# EAGLE board Qwiic Mux-Panel (EAGLE 9.6.0), part 1 of 3
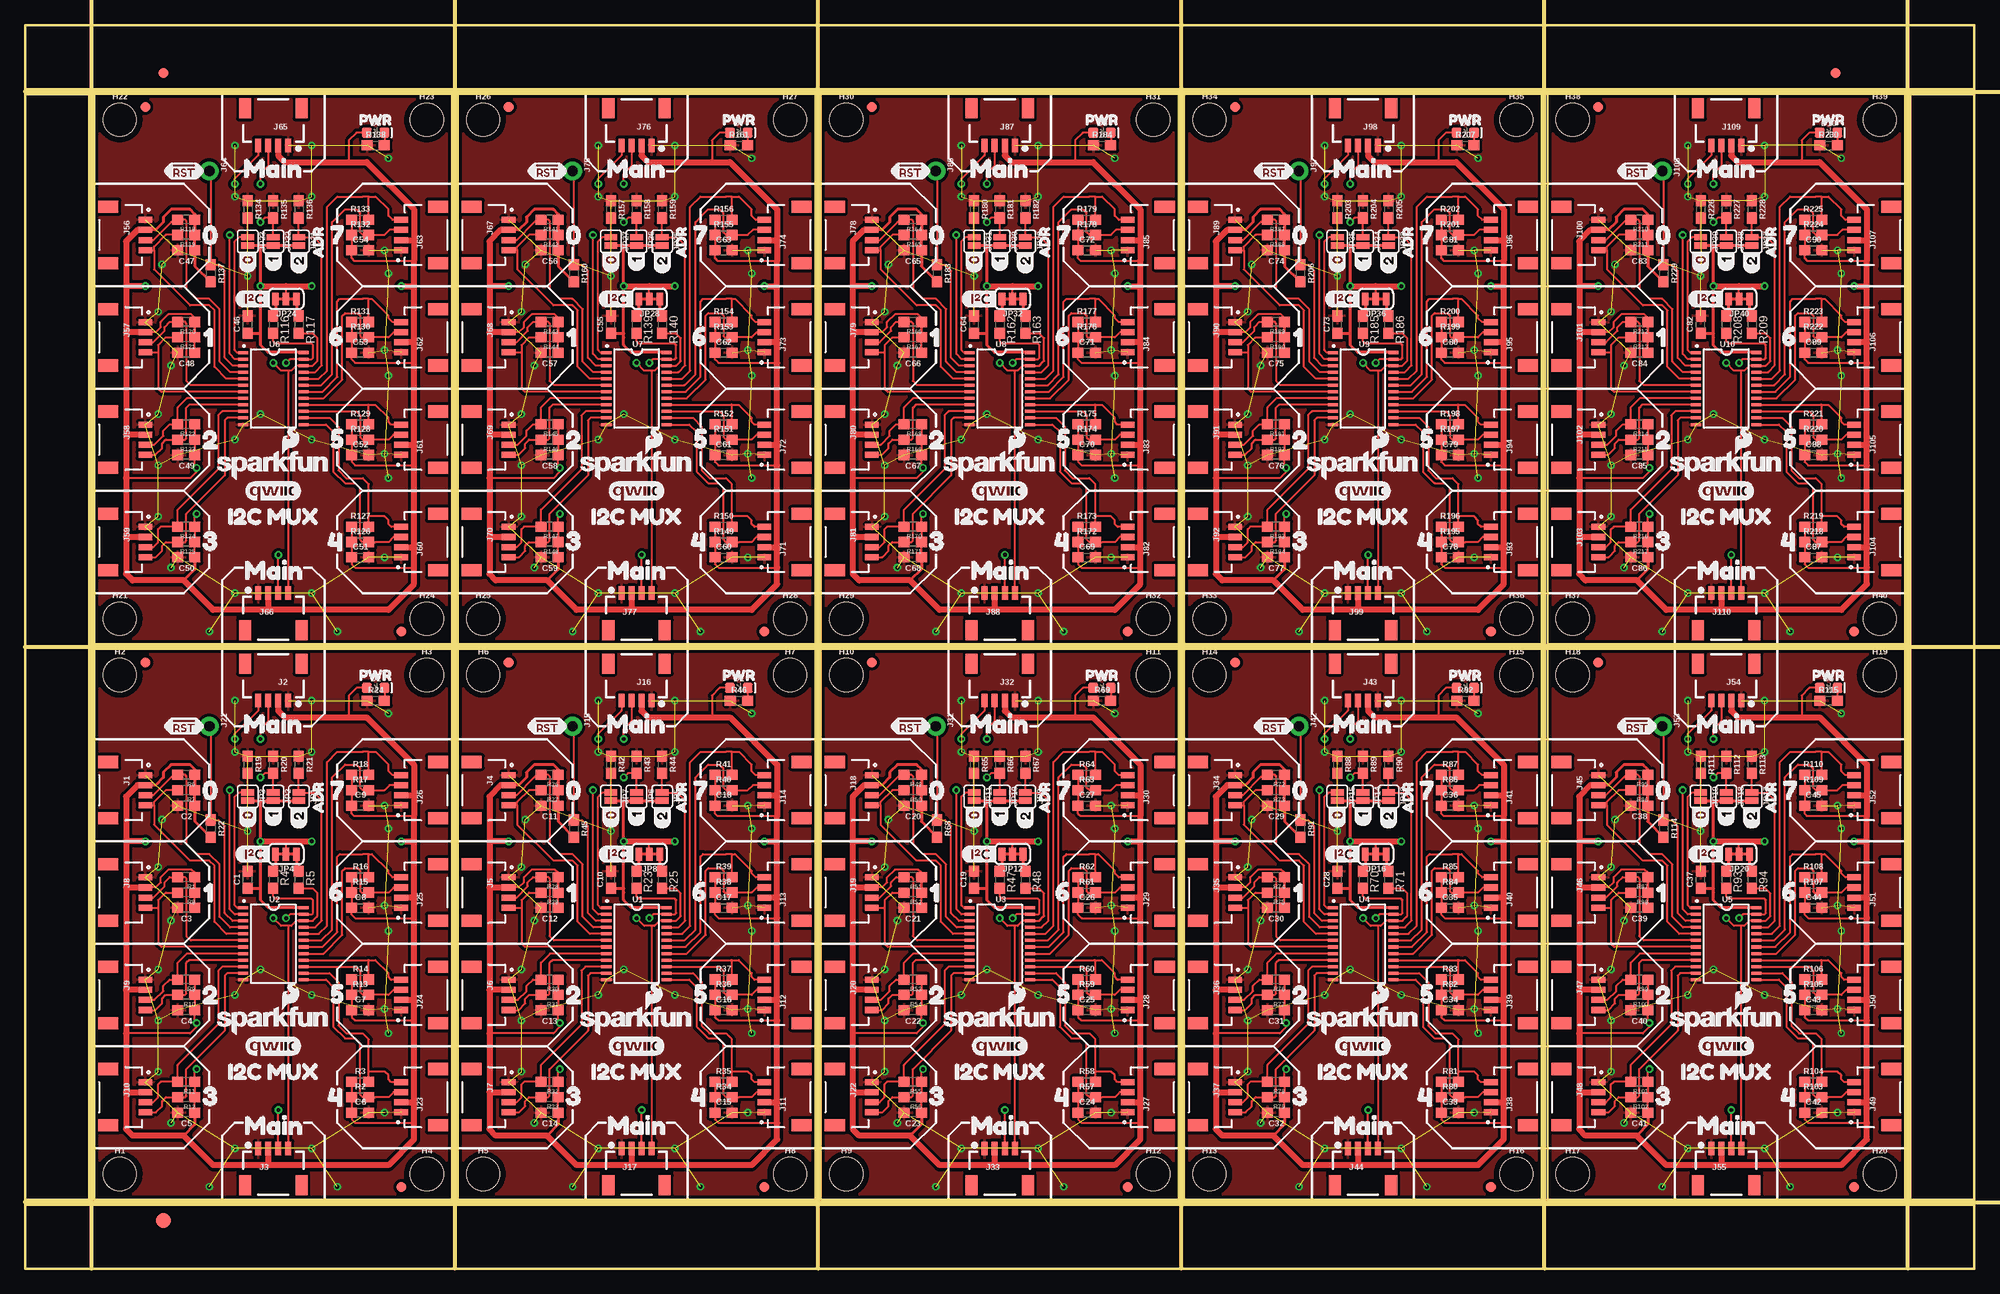
[diagram p0: board, top side]
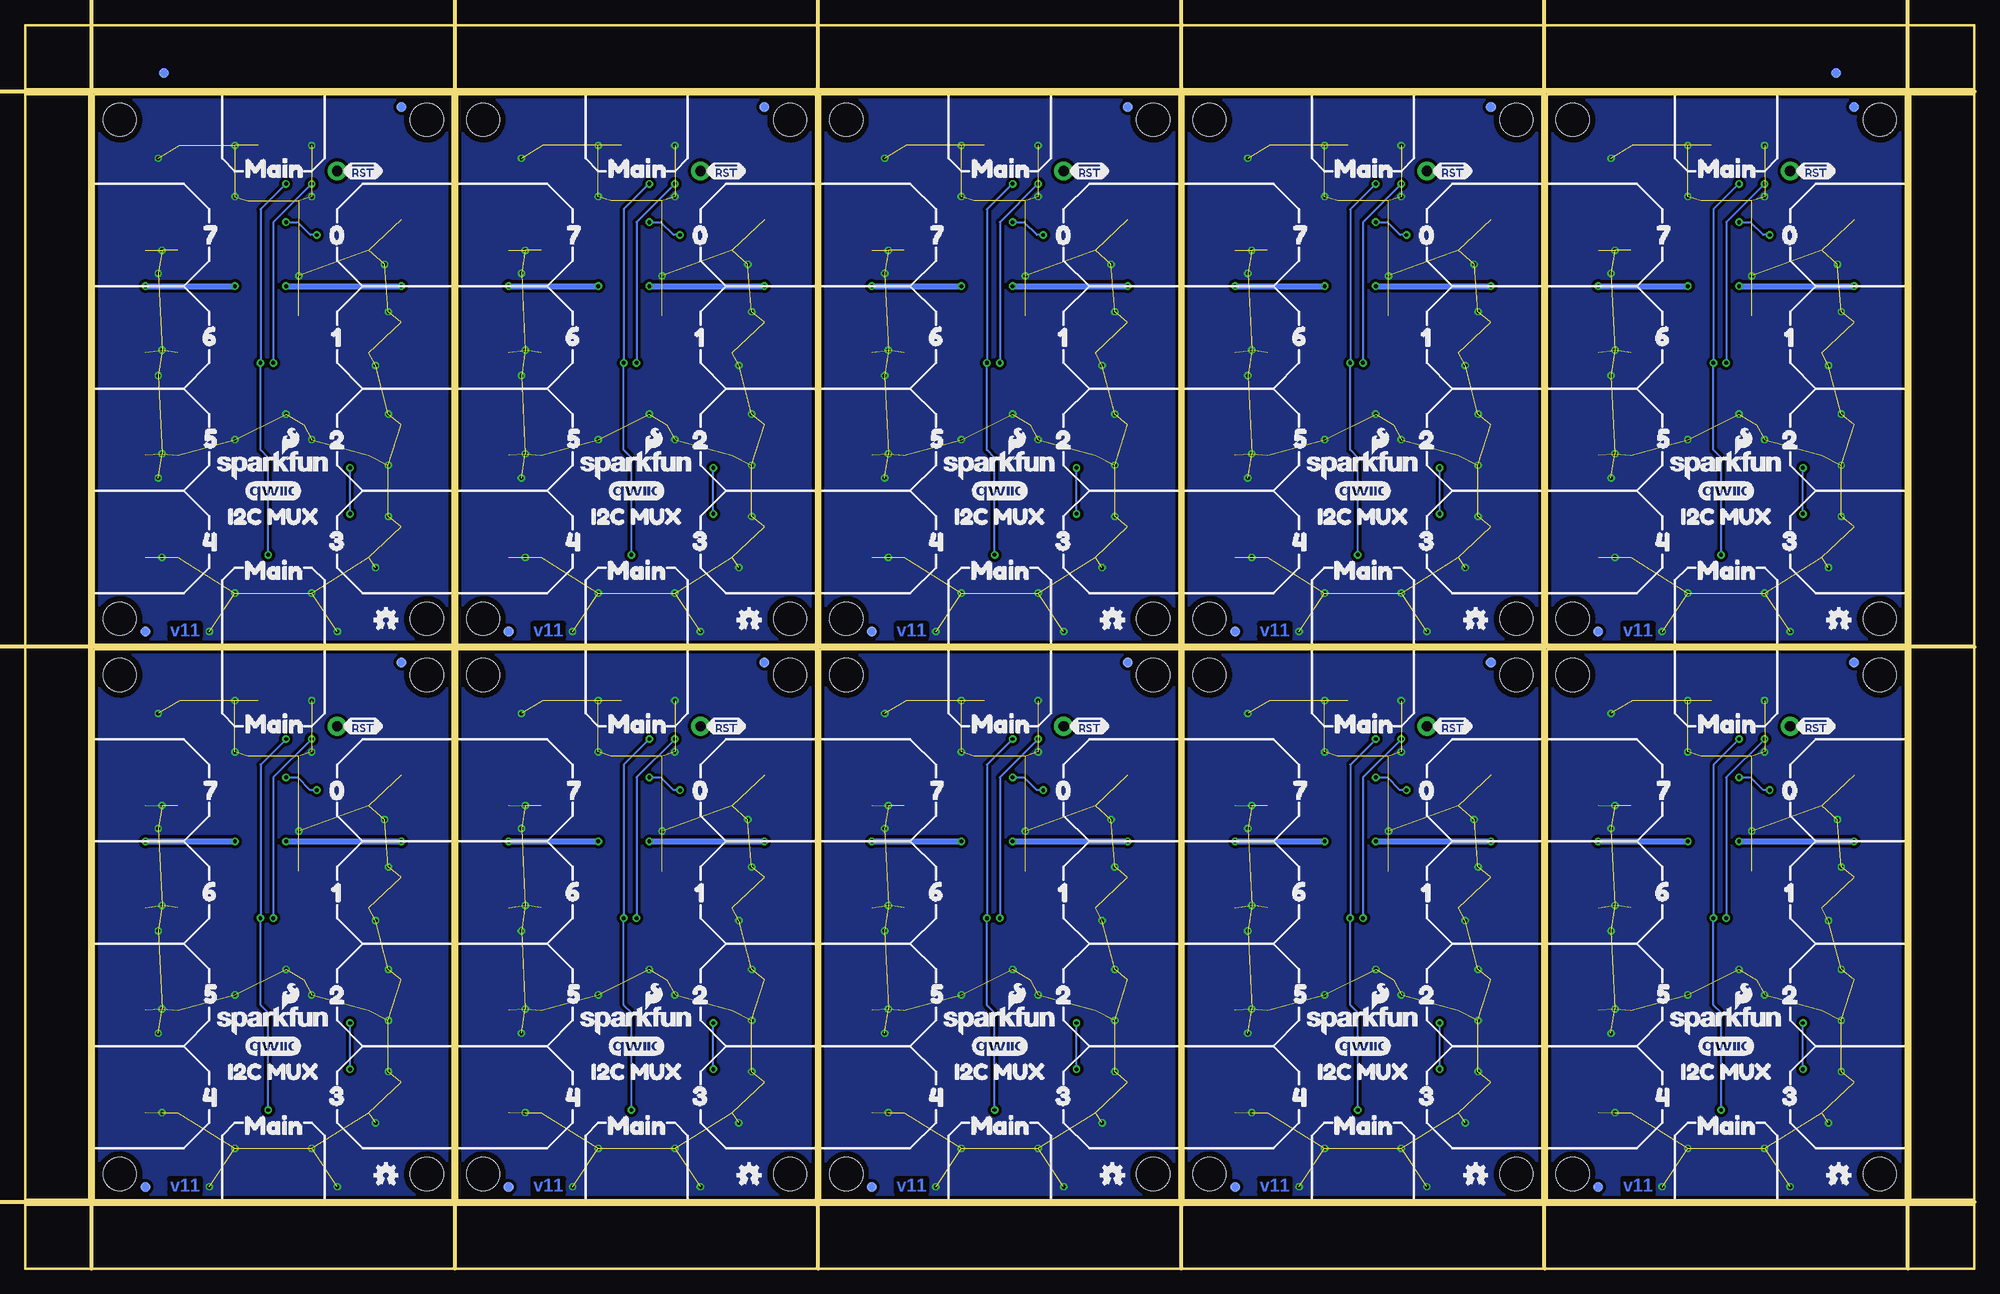
[diagram p1: board, bottom side, seen from below]

Size 193.55 x 123.44 mm. Coordinates in mm from the lower left corner, seen from the top.
Outline: 6.86,61.47 6.86,6.86 42.42,6.86 42.42,61.47 6.86,61.47
Outline: 42.93,61.47 42.93,6.86 78.49,6.86 78.49,61.47 42.93,61.47
Outline: 78.99,61.47 78.99,6.86 114.55,6.86 114.55,61.47 78.99,61.47
Outline: 115.06,61.47 115.06,6.86 150.62,6.86 150.62,61.47 115.06,61.47
Outline: 151.13,61.47 151.13,6.86 186.69,6.86 186.69,61.47 151.13,61.47
Outline: 6.86,116.59 6.86,61.98 42.42,61.98 42.42,116.59 6.86,116.59
Outline: 42.93,116.59 42.93,61.98 78.49,61.98 78.49,116.59 42.93,116.59
Outline: 78.99,116.59 78.99,61.98 114.55,61.98 114.55,116.59 78.99,116.59
Outline: 115.06,116.59 115.06,61.98 150.62,61.98 150.62,116.59 115.06,116.59
Outline: 151.13,116.59 151.13,61.98 186.69,61.98 186.69,116.59 151.13,116.59
Outline: 0,6.35 193.55,6.35 193.55,0 0,0 0,6.35
Outline: 187.2,116.59 193.55,116.59 193.55,6.86 187.2,6.86 187.2,116.59
Outline: 0,123.44 193.55,123.44 193.55,117.09 0,117.09 0,123.44
Outline: 0,116.59 6.35,116.59 6.35,6.86 0,6.86 0,116.59
Copper layers (1*16): Top 0.035mm / dielectric 1.5mm / Bottom 0.035mm
Design rules "SFE-Design": minimum track width 7mil, minimum drill 15mil, track to track 6mil, track to pad 6mil, pad to pad 6mil, via to via 6mil, smd to smd 6mil, copper to edge 7mil, drill to drill 7mil, minimum pad ring 7mil, minimum via ring 7mil, stop-mask expansion 4mil, vias tented up to drill 25mil, thermal gap 10mil
Net classes: 0 Default: width 0.178 mm; 1 vcc: width 0.178 mm
Milling: 9 lines

## Footprints (pad centres in the part's own frame; a part is rotated, then mirrored left to right if it is on the bottom)
0603 = smd 1.1 x 1: 1 -0.85,0; 2 0.85,0
LED-0603 = smd 1 x 1: A -0.877,0; C 0.877,0
FIDUCIAL-1X2 = smd 1 x 1: 1 0,0
FIDUCIAL-1.5X3 = smd 1.5 x 1.5: 1 0,0
STAND-OFF = hole 3.302: 0,0
JST04_1MM_RA = smd 0.6 x 1.35: 1 -1.5,0; 2 -0.5,0; 3 0.5,0; 4 1.5,0 | smd 1.2 x 2: NC1 2.8,-3.675; NC2 -2.8,-3.675
1X04_1MM_RA = smd 0.6 x 1.35: 1 -1.5,0; 2 -0.5,0; 3 0.5,0; 4 1.5,0 | smd 1.2 x 2: NC1 2.8,-3.675; NC2 -2.8,-3.675
1X01_NO_SILK = drill 1.016 pad 1.88: 1 0,0
SMT-JUMPER_2_NO_SILK = smd 0.635 x 1.27: 1 -0.406,0; 2 0.406,0
SMT-JUMPER_3_2-NC_TRACE_SILK = smd 0.66 x 1.27: 1 -1.041,0; 2 0,0; 3 1.041,0
TSSOP28 = smd 1 x 0.3: 1 -3,3.57; 2 -3,2.925; 3 -3,2.275; 4 -3,1.625; 5 -3,0.975; 6 -3,0.325; 7 -3,-0.325; 8 -3,-0.975; 9 -3,-1.625; 10 -3,-2.275; 11 -3,-2.925; 12 -3,-3.575; 13 3,-3.575; 14 3,-2.925; 15 3,-2.275; 16 3,-1.625; 17 3,-0.975; 18 3,-0.325; 19 3,0.325; 20 3,0.975; 21 3,1.625; 22 3,2.275; 23 3,2.925; 24 3,3.575

## Placement (x,y rotation side)
C1  0.1uF  [0603]  22.1,38.61 90 top
C2  1.0uF  [0603]  16,45.97 180 top
C3  1.0uF  [0603]  16,35.81 180 top
C4  1.0uF  [0603]  16,25.65 180 top
C5  1.0uF  [0603]  16,15.49 180 top
C6  1.0uF  [0603]  33.27,15.49 0 top
C7  1.0uF  [0603]  33.27,25.65 0 top
C8  1.0uF  [0603]  33.27,35.81 0 top
C9  1.0uF  [0603]  33.27,45.97 0 top
C10  0.1uF  [0603]  58.17,38.61 90 top
C11  1.0uF  [0603]  52.07,45.97 180 top
C12  1.0uF  [0603]  52.07,35.81 180 top
C13  1.0uF  [0603]  52.07,25.65 180 top
C14  1.0uF  [0603]  52.07,15.49 180 top
C15  1.0uF  [0603]  69.34,15.49 0 top
C16  1.0uF  [0603]  69.34,25.65 0 top
C17  1.0uF  [0603]  69.34,35.81 0 top
C18  1.0uF  [0603]  69.34,45.97 0 top
C19  0.1uF  [0603]  94.23,38.61 90 top
C20  1.0uF  [0603]  88.14,45.97 180 top
C21  1.0uF  [0603]  88.14,35.81 180 top
C22  1.0uF  [0603]  88.14,25.65 180 top
C23  1.0uF  [0603]  88.14,15.49 180 top
C24  1.0uF  [0603]  105.41,15.49 0 top
C25  1.0uF  [0603]  105.41,25.65 0 top
C26  1.0uF  [0603]  105.41,35.81 0 top
C27  1.0uF  [0603]  105.41,45.97 0 top
C28  0.1uF  [0603]  130.3,38.61 90 top
C29  1.0uF  [0603]  124.21,45.97 180 top
C30  1.0uF  [0603]  124.21,35.81 180 top
C31  1.0uF  [0603]  124.21,25.65 180 top
C32  1.0uF  [0603]  124.21,15.49 180 top
C33  1.0uF  [0603]  141.48,15.49 0 top
C34  1.0uF  [0603]  141.48,25.65 0 top
C35  1.0uF  [0603]  141.48,35.81 0 top
C36  1.0uF  [0603]  141.48,45.97 0 top
C37  0.1uF  [0603]  166.37,38.61 90 top
C38  1.0uF  [0603]  160.27,45.97 180 top
C39  1.0uF  [0603]  160.27,35.81 180 top
C40  1.0uF  [0603]  160.27,25.65 180 top
C41  1.0uF  [0603]  160.27,15.49 180 top
C42  1.0uF  [0603]  177.55,15.49 0 top
C43  1.0uF  [0603]  177.55,25.65 0 top
C44  1.0uF  [0603]  177.55,35.81 0 top
C45  1.0uF  [0603]  177.55,45.97 0 top
C46  0.1uF  [0603]  22.1,93.73 90 top
C47  1.0uF  [0603]  16,101.09 180 top
C48  1.0uF  [0603]  16,90.93 180 top
C49  1.0uF  [0603]  16,80.77 180 top
C50  1.0uF  [0603]  16,70.61 180 top
C51  1.0uF  [0603]  33.27,70.61 0 top
C52  1.0uF  [0603]  33.27,80.77 0 top
C53  1.0uF  [0603]  33.27,90.93 0 top
C54  1.0uF  [0603]  33.27,101.09 0 top
C55  0.1uF  [0603]  58.17,93.73 90 top
C56  1.0uF  [0603]  52.07,101.09 180 top
C57  1.0uF  [0603]  52.07,90.93 180 top
C58  1.0uF  [0603]  52.07,80.77 180 top
C59  1.0uF  [0603]  52.07,70.61 180 top
C60  1.0uF  [0603]  69.34,70.61 0 top
C61  1.0uF  [0603]  69.34,80.77 0 top
C62  1.0uF  [0603]  69.34,90.93 0 top
C63  1.0uF  [0603]  69.34,101.09 0 top
C64  0.1uF  [0603]  94.23,93.73 90 top
C65  1.0uF  [0603]  88.14,101.09 180 top
C66  1.0uF  [0603]  88.14,90.93 180 top
C67  1.0uF  [0603]  88.14,80.77 180 top
C68  1.0uF  [0603]  88.14,70.61 180 top
C69  1.0uF  [0603]  105.41,70.61 0 top
C70  1.0uF  [0603]  105.41,80.77 0 top
C71  1.0uF  [0603]  105.41,90.93 0 top
C72  1.0uF  [0603]  105.41,101.09 0 top
C73  0.1uF  [0603]  130.3,93.73 90 top
C74  1.0uF  [0603]  124.21,101.09 180 top
C75  1.0uF  [0603]  124.21,90.93 180 top
C76  1.0uF  [0603]  124.21,80.77 180 top
C77  1.0uF  [0603]  124.21,70.61 180 top
C78  1.0uF  [0603]  141.48,70.61 0 top
C79  1.0uF  [0603]  141.48,80.77 0 top
C80  1.0uF  [0603]  141.48,90.93 0 top
C81  1.0uF  [0603]  141.48,101.09 0 top
C82  0.1uF  [0603]  166.37,93.73 90 top
C83  1.0uF  [0603]  160.27,101.09 180 top
C84  1.0uF  [0603]  160.27,90.93 180 top
C85  1.0uF  [0603]  160.27,80.77 180 top
C86  1.0uF  [0603]  160.27,70.61 180 top
C87  1.0uF  [0603]  177.55,70.61 0 top
C88  1.0uF  [0603]  177.55,80.77 0 top
C89  1.0uF  [0603]  177.55,90.93 0 top
C90  1.0uF  [0603]  177.55,101.09 0 top
D1  RED  [LED-0603]  70.87,57.66 0 top
D2  RED  [LED-0603]  34.8,57.66 0 top
D3  RED  [LED-0603]  106.93,57.66 0 top
D4  RED  [LED-0603]  143,57.66 0 top
D5  RED  [LED-0603]  179.07,57.66 0 top
D6  RED  [LED-0603]  34.8,112.78 0 top
D7  RED  [LED-0603]  70.87,112.78 0 top
D8  RED  [LED-0603]  106.93,112.78 0 top
D9  RED  [LED-0603]  143,112.78 0 top
D10  RED  [LED-0603]  179.07,112.78 0 top
E$1  [FIDUCIAL-1X2]  13.72,118.68 0 top
E$2  [FIDUCIAL-1X2]  13.72,118.68 0 bottom
E$3  [FIDUCIAL-1X2]  179.77,118.68 0 top
E$4  [FIDUCIAL-1X2]  179.77,118.68 0 bottom
E$5  [FIDUCIAL-1.5X3]  13.72,4.76 0 top
FD1  FIDUCIAL1X2  [FIDUCIAL-1X2]  11.94,60.2 180 top
FD2  FIDUCIAL1X2  [FIDUCIAL-1X2]  37.34,8.13 180 top
FD3  FIDUCIAL1X2  [FIDUCIAL-1X2]  37.34,8.13 0 bottom
FD4  FIDUCIAL1X2  [FIDUCIAL-1X2]  11.94,60.2 0 bottom
FD5  FIDUCIAL1X2  [FIDUCIAL-1X2]  48.01,60.2 180 top
FD6  FIDUCIAL1X2  [FIDUCIAL-1X2]  73.41,8.13 180 top
FD7  FIDUCIAL1X2  [FIDUCIAL-1X2]  73.41,8.13 0 bottom
FD8  FIDUCIAL1X2  [FIDUCIAL-1X2]  48.01,60.2 0 bottom
FD9  FIDUCIAL1X2  [FIDUCIAL-1X2]  84.07,60.2 180 top
FD10  FIDUCIAL1X2  [FIDUCIAL-1X2]  109.47,8.13 180 top
FD11  FIDUCIAL1X2  [FIDUCIAL-1X2]  109.47,8.13 0 bottom
FD12  FIDUCIAL1X2  [FIDUCIAL-1X2]  84.07,60.2 0 bottom
FD13  FIDUCIAL1X2  [FIDUCIAL-1X2]  120.14,60.2 180 top
FD14  FIDUCIAL1X2  [FIDUCIAL-1X2]  145.54,8.13 180 top
FD15  FIDUCIAL1X2  [FIDUCIAL-1X2]  145.54,8.13 0 bottom
FD16  FIDUCIAL1X2  [FIDUCIAL-1X2]  120.14,60.2 0 bottom
FD17  FIDUCIAL1X2  [FIDUCIAL-1X2]  156.21,60.2 180 top
FD18  FIDUCIAL1X2  [FIDUCIAL-1X2]  181.61,8.13 180 top
FD19  FIDUCIAL1X2  [FIDUCIAL-1X2]  181.61,8.13 0 bottom
FD20  FIDUCIAL1X2  [FIDUCIAL-1X2]  156.21,60.2 0 bottom
FD21  FIDUCIAL1X2  [FIDUCIAL-1X2]  11.94,115.32 180 top
FD22  FIDUCIAL1X2  [FIDUCIAL-1X2]  37.34,63.25 180 top
FD23  FIDUCIAL1X2  [FIDUCIAL-1X2]  37.34,63.25 0 bottom
FD24  FIDUCIAL1X2  [FIDUCIAL-1X2]  11.94,115.32 0 bottom
FD25  FIDUCIAL1X2  [FIDUCIAL-1X2]  48.01,115.32 180 top
FD26  FIDUCIAL1X2  [FIDUCIAL-1X2]  73.41,63.25 180 top
FD27  FIDUCIAL1X2  [FIDUCIAL-1X2]  73.41,63.25 0 bottom
FD28  FIDUCIAL1X2  [FIDUCIAL-1X2]  48.01,115.32 0 bottom
FD29  FIDUCIAL1X2  [FIDUCIAL-1X2]  84.07,115.32 180 top
FD30  FIDUCIAL1X2  [FIDUCIAL-1X2]  109.47,63.25 180 top
FD31  FIDUCIAL1X2  [FIDUCIAL-1X2]  109.47,63.25 0 bottom
FD32  FIDUCIAL1X2  [FIDUCIAL-1X2]  84.07,115.32 0 bottom
FD33  FIDUCIAL1X2  [FIDUCIAL-1X2]  120.14,115.32 180 top
FD34  FIDUCIAL1X2  [FIDUCIAL-1X2]  145.54,63.25 180 top
FD35  FIDUCIAL1X2  [FIDUCIAL-1X2]  145.54,63.25 0 bottom
FD36  FIDUCIAL1X2  [FIDUCIAL-1X2]  120.14,115.32 0 bottom
FD37  FIDUCIAL1X2  [FIDUCIAL-1X2]  156.21,115.32 180 top
FD38  FIDUCIAL1X2  [FIDUCIAL-1X2]  181.61,63.25 180 top
FD39  FIDUCIAL1X2  [FIDUCIAL-1X2]  181.61,63.25 0 bottom
FD40  FIDUCIAL1X2  [FIDUCIAL-1X2]  156.21,115.32 0 bottom
H1  STAND-OFF  [STAND-OFF]  9.4,9.4 0 top
H2  STAND-OFF  [STAND-OFF]  9.4,58.93 0 top
H3  STAND-OFF  [STAND-OFF]  39.88,58.93 0 top
H4  STAND-OFF  [STAND-OFF]  39.88,9.4 0 top
H5  STAND-OFF  [STAND-OFF]  45.47,9.4 0 top
H6  STAND-OFF  [STAND-OFF]  45.47,58.93 0 top
H7  STAND-OFF  [STAND-OFF]  75.95,58.93 0 top
H8  STAND-OFF  [STAND-OFF]  75.95,9.4 0 top
H9  STAND-OFF  [STAND-OFF]  81.53,9.4 0 top
H10  STAND-OFF  [STAND-OFF]  81.53,58.93 0 top
H11  STAND-OFF  [STAND-OFF]  112.01,58.93 0 top
H12  STAND-OFF  [STAND-OFF]  112.01,9.4 0 top
H13  STAND-OFF  [STAND-OFF]  117.6,9.4 0 top
H14  STAND-OFF  [STAND-OFF]  117.6,58.93 0 top
H15  STAND-OFF  [STAND-OFF]  148.08,58.93 0 top
H16  STAND-OFF  [STAND-OFF]  148.08,9.4 0 top
H17  STAND-OFF  [STAND-OFF]  153.67,9.4 0 top
H18  STAND-OFF  [STAND-OFF]  153.67,58.93 0 top
H19  STAND-OFF  [STAND-OFF]  184.15,58.93 0 top
H20  STAND-OFF  [STAND-OFF]  184.15,9.4 0 top
H21  STAND-OFF  [STAND-OFF]  9.4,64.52 0 top
H22  STAND-OFF  [STAND-OFF]  9.4,114.05 0 top
H23  STAND-OFF  [STAND-OFF]  39.88,114.05 0 top
H24  STAND-OFF  [STAND-OFF]  39.88,64.52 0 top
H25  STAND-OFF  [STAND-OFF]  45.47,64.52 0 top
H26  STAND-OFF  [STAND-OFF]  45.47,114.05 0 top
H27  STAND-OFF  [STAND-OFF]  75.95,114.05 0 top
H28  STAND-OFF  [STAND-OFF]  75.95,64.52 0 top
H29  STAND-OFF  [STAND-OFF]  81.53,64.52 0 top
H30  STAND-OFF  [STAND-OFF]  81.53,114.05 0 top
H31  STAND-OFF  [STAND-OFF]  112.01,114.05 0 top
H32  STAND-OFF  [STAND-OFF]  112.01,64.52 0 top
H33  STAND-OFF  [STAND-OFF]  117.6,64.52 0 top
H34  STAND-OFF  [STAND-OFF]  117.6,114.05 0 top
H35  STAND-OFF  [STAND-OFF]  148.08,114.05 0 top
H36  STAND-OFF  [STAND-OFF]  148.08,64.52 0 top
H37  STAND-OFF  [STAND-OFF]  153.67,64.52 0 top
H38  STAND-OFF  [STAND-OFF]  153.67,114.05 0 top
H39  STAND-OFF  [STAND-OFF]  184.15,114.05 0 top
H40  STAND-OFF  [STAND-OFF]  184.15,64.52 0 top
J1  QWIIC_RIGHT_ANGLE  [JST04_1MM_RA]  11.94,47.5 270 top
J2  SMD  [1X04_1MM_RA]  24.64,56.39 180 top
J3  SMD  [1X04_1MM_RA]  24.64,11.94 0 top
J4  QWIIC_RIGHT_ANGLE  [JST04_1MM_RA]  48.01,47.5 270 top
J5  QWIIC_RIGHT_ANGLE  [JST04_1MM_RA]  48.01,37.34 270 top
J6  QWIIC_RIGHT_ANGLE  [JST04_1MM_RA]  48.01,27.18 270 top
J7  QWIIC_RIGHT_ANGLE  [JST04_1MM_RA]  48.01,17.02 270 top
J8  QWIIC_RIGHT_ANGLE  [JST04_1MM_RA]  11.94,37.34 270 top
J9  QWIIC_RIGHT_ANGLE  [JST04_1MM_RA]  11.94,27.18 270 top
J10  QWIIC_RIGHT_ANGLE  [JST04_1MM_RA]  11.94,17.02 270 top
J11  QWIIC_RIGHT_ANGLE  [JST04_1MM_RA]  73.41,17.02 90 top
J12  QWIIC_RIGHT_ANGLE  [JST04_1MM_RA]  73.41,27.18 90 top
J13  QWIIC_RIGHT_ANGLE  [JST04_1MM_RA]  73.41,37.34 90 top
J14  QWIIC_RIGHT_ANGLE  [JST04_1MM_RA]  73.41,47.5 90 top
J15  [1X01_NO_SILK]  54.36,53.85 270 top
J16  SMD  [1X04_1MM_RA]  60.71,56.39 180 top
J17  SMD  [1X04_1MM_RA]  60.71,11.94 0 top
J18  QWIIC_RIGHT_ANGLE  [JST04_1MM_RA]  84.07,47.5 270 top
J19  QWIIC_RIGHT_ANGLE  [JST04_1MM_RA]  84.07,37.34 270 top
J20  QWIIC_RIGHT_ANGLE  [JST04_1MM_RA]  84.07,27.18 270 top
J21  [1X01_NO_SILK]  18.29,53.85 270 top
J22  QWIIC_RIGHT_ANGLE  [JST04_1MM_RA]  84.07,17.02 270 top
J23  QWIIC_RIGHT_ANGLE  [JST04_1MM_RA]  37.34,17.02 90 top
J24  QWIIC_RIGHT_ANGLE  [JST04_1MM_RA]  37.34,27.18 90 top
J25  QWIIC_RIGHT_ANGLE  [JST04_1MM_RA]  37.34,37.34 90 top
J26  QWIIC_RIGHT_ANGLE  [JST04_1MM_RA]  37.34,47.5 90 top
J27  QWIIC_RIGHT_ANGLE  [JST04_1MM_RA]  109.47,17.02 90 top
J28  QWIIC_RIGHT_ANGLE  [JST04_1MM_RA]  109.47,27.18 90 top
J29  QWIIC_RIGHT_ANGLE  [JST04_1MM_RA]  109.47,37.34 90 top
J30  QWIIC_RIGHT_ANGLE  [JST04_1MM_RA]  109.47,47.5 90 top
J31  [1X01_NO_SILK]  90.42,53.85 270 top
J32  SMD  [1X04_1MM_RA]  96.77,56.39 180 top
J33  SMD  [1X04_1MM_RA]  96.77,11.94 0 top
J34  QWIIC_RIGHT_ANGLE  [JST04_1MM_RA]  120.14,47.5 270 top
J35  QWIIC_RIGHT_ANGLE  [JST04_1MM_RA]  120.14,37.34 270 top
J36  QWIIC_RIGHT_ANGLE  [JST04_1MM_RA]  120.14,27.18 270 top
J37  QWIIC_RIGHT_ANGLE  [JST04_1MM_RA]  120.14,17.02 270 top
J38  QWIIC_RIGHT_ANGLE  [JST04_1MM_RA]  145.54,17.02 90 top
J39  QWIIC_RIGHT_ANGLE  [JST04_1MM_RA]  145.54,27.18 90 top
J40  QWIIC_RIGHT_ANGLE  [JST04_1MM_RA]  145.54,37.34 90 top
J41  QWIIC_RIGHT_ANGLE  [JST04_1MM_RA]  145.54,47.5 90 top
J42  [1X01_NO_SILK]  126.49,53.85 270 top
J43  SMD  [1X04_1MM_RA]  132.84,56.39 180 top
J44  SMD  [1X04_1MM_RA]  132.84,11.94 0 top
J45  QWIIC_RIGHT_ANGLE  [JST04_1MM_RA]  156.21,47.5 270 top
J46  QWIIC_RIGHT_ANGLE  [JST04_1MM_RA]  156.21,37.34 270 top
J47  QWIIC_RIGHT_ANGLE  [JST04_1MM_RA]  156.21,27.18 270 top
J48  QWIIC_RIGHT_ANGLE  [JST04_1MM_RA]  156.21,17.02 270 top
J49  QWIIC_RIGHT_ANGLE  [JST04_1MM_RA]  181.61,17.02 90 top
J50  QWIIC_RIGHT_ANGLE  [JST04_1MM_RA]  181.61,27.18 90 top
J51  QWIIC_RIGHT_ANGLE  [JST04_1MM_RA]  181.61,37.34 90 top
J52  QWIIC_RIGHT_ANGLE  [JST04_1MM_RA]  181.61,47.5 90 top
J53  [1X01_NO_SILK]  162.56,53.85 270 top
J54  SMD  [1X04_1MM_RA]  168.91,56.39 180 top
J55  SMD  [1X04_1MM_RA]  168.91,11.94 0 top
J56  QWIIC_RIGHT_ANGLE  [JST04_1MM_RA]  11.94,102.62 270 top
J57  QWIIC_RIGHT_ANGLE  [JST04_1MM_RA]  11.94,92.46 270 top
J58  QWIIC_RIGHT_ANGLE  [JST04_1MM_RA]  11.94,82.3 270 top
J59  QWIIC_RIGHT_ANGLE  [JST04_1MM_RA]  11.94,72.14 270 top
J60  QWIIC_RIGHT_ANGLE  [JST04_1MM_RA]  37.34,72.14 90 top
J61  QWIIC_RIGHT_ANGLE  [JST04_1MM_RA]  37.34,82.3 90 top
J62  QWIIC_RIGHT_ANGLE  [JST04_1MM_RA]  37.34,92.46 90 top
J63  QWIIC_RIGHT_ANGLE  [JST04_1MM_RA]  37.34,102.62 90 top
J64  [1X01_NO_SILK]  18.29,108.97 270 top
J65  SMD  [1X04_1MM_RA]  24.64,111.51 180 top
J66  SMD  [1X04_1MM_RA]  24.64,67.06 0 top
J67  QWIIC_RIGHT_ANGLE  [JST04_1MM_RA]  48.01,102.62 270 top
J68  QWIIC_RIGHT_ANGLE  [JST04_1MM_RA]  48.01,92.46 270 top
J69  QWIIC_RIGHT_ANGLE  [JST04_1MM_RA]  48.01,82.3 270 top
J70  QWIIC_RIGHT_ANGLE  [JST04_1MM_RA]  48.01,72.14 270 top
J71  QWIIC_RIGHT_ANGLE  [JST04_1MM_RA]  73.41,72.14 90 top
J72  QWIIC_RIGHT_ANGLE  [JST04_1MM_RA]  73.41,82.3 90 top
J73  QWIIC_RIGHT_ANGLE  [JST04_1MM_RA]  73.41,92.46 90 top
J74  QWIIC_RIGHT_ANGLE  [JST04_1MM_RA]  73.41,102.62 90 top
J75  [1X01_NO_SILK]  54.36,108.97 270 top
J76  SMD  [1X04_1MM_RA]  60.71,111.51 180 top
J77  SMD  [1X04_1MM_RA]  60.71,67.06 0 top
J78  QWIIC_RIGHT_ANGLE  [JST04_1MM_RA]  84.07,102.62 270 top
J79  QWIIC_RIGHT_ANGLE  [JST04_1MM_RA]  84.07,92.46 270 top
J80  QWIIC_RIGHT_ANGLE  [JST04_1MM_RA]  84.07,82.3 270 top
J81  QWIIC_RIGHT_ANGLE  [JST04_1MM_RA]  84.07,72.14 270 top
J82  QWIIC_RIGHT_ANGLE  [JST04_1MM_RA]  109.47,72.14 90 top
J83  QWIIC_RIGHT_ANGLE  [JST04_1MM_RA]  109.47,82.3 90 top
J84  QWIIC_RIGHT_ANGLE  [JST04_1MM_RA]  109.47,92.46 90 top
J85  QWIIC_RIGHT_ANGLE  [JST04_1MM_RA]  109.47,102.62 90 top
J86  [1X01_NO_SILK]  90.42,108.97 270 top
J87  SMD  [1X04_1MM_RA]  96.77,111.51 180 top
J88  SMD  [1X04_1MM_RA]  96.77,67.06 0 top
J89  QWIIC_RIGHT_ANGLE  [JST04_1MM_RA]  120.14,102.62 270 top
J90  QWIIC_RIGHT_ANGLE  [JST04_1MM_RA]  120.14,92.46 270 top
J91  QWIIC_RIGHT_ANGLE  [JST04_1MM_RA]  120.14,82.3 270 top
J92  QWIIC_RIGHT_ANGLE  [JST04_1MM_RA]  120.14,72.14 270 top
J93  QWIIC_RIGHT_ANGLE  [JST04_1MM_RA]  145.54,72.14 90 top
J94  QWIIC_RIGHT_ANGLE  [JST04_1MM_RA]  145.54,82.3 90 top
J95  QWIIC_RIGHT_ANGLE  [JST04_1MM_RA]  145.54,92.46 90 top
J96  QWIIC_RIGHT_ANGLE  [JST04_1MM_RA]  145.54,102.62 90 top
J97  [1X01_NO_SILK]  126.49,108.97 270 top
J98  SMD  [1X04_1MM_RA]  132.84,111.51 180 top
J99  SMD  [1X04_1MM_RA]  132.84,67.06 0 top
J100  QWIIC_RIGHT_ANGLE  [JST04_1MM_RA]  156.21,102.62 270 top
J101  QWIIC_RIGHT_ANGLE  [JST04_1MM_RA]  156.21,92.46 270 top
J102  QWIIC_RIGHT_ANGLE  [JST04_1MM_RA]  156.21,82.3 270 top
J103  QWIIC_RIGHT_ANGLE  [JST04_1MM_RA]  156.21,72.14 270 top
J104  QWIIC_RIGHT_ANGLE  [JST04_1MM_RA]  181.61,72.14 90 top
J105  QWIIC_RIGHT_ANGLE  [JST04_1MM_RA]  181.61,82.3 90 top
J106  QWIIC_RIGHT_ANGLE  [JST04_1MM_RA]  181.61,92.46 90 top
J107  QWIIC_RIGHT_ANGLE  [JST04_1MM_RA]  181.61,102.62 90 top
J108  [1X01_NO_SILK]  162.56,108.97 270 top
J109  SMD  [1X04_1MM_RA]  168.91,111.51 180 top
J110  SMD  [1X04_1MM_RA]  168.91,67.06 0 top
JP1  JUMPER-SMT_2_NO_SILK  [SMT-JUMPER_2_NO_SILK]  27.18,46.86 270 top
JP2  JUMPER-SMT_2_NO_SILK  [SMT-JUMPER_2_NO_SILK]  24.64,46.86 270 top
JP3  JUMPER-SMT_2_NO_SILK  [SMT-JUMPER_2_NO_SILK]  22.1,46.86 270 top
JP4  JUMPER-SMT_3_2-NC_TRACE_SILK  [SMT-JUMPER_3_2-NC_TRACE_SILK]  25.91,41.15 180 top
JP5  JUMPER-SMT_2_NO_SILK  [SMT-JUMPER_2_NO_SILK]  63.25,46.86 270 top
JP6  JUMPER-SMT_2_NO_SILK  [SMT-JUMPER_2_NO_SILK]  60.71,46.86 270 top
JP7  JUMPER-SMT_2_NO_SILK  [SMT-JUMPER_2_NO_SILK]  58.17,46.86 270 top
JP8  JUMPER-SMT_3_2-NC_TRACE_SILK  [SMT-JUMPER_3_2-NC_TRACE_SILK]  61.98,41.15 180 top
JP9  JUMPER-SMT_2_NO_SILK  [SMT-JUMPER_2_NO_SILK]  99.31,46.86 270 top
JP10  JUMPER-SMT_2_NO_SILK  [SMT-JUMPER_2_NO_SILK]  96.77,46.86 270 top
JP11  JUMPER-SMT_2_NO_SILK  [SMT-JUMPER_2_NO_SILK]  94.23,46.86 270 top
JP12  JUMPER-SMT_3_2-NC_TRACE_SILK  [SMT-JUMPER_3_2-NC_TRACE_SILK]  98.04,41.15 180 top
JP13  JUMPER-SMT_2_NO_SILK  [SMT-JUMPER_2_NO_SILK]  135.38,46.86 270 top
JP14  JUMPER-SMT_2_NO_SILK  [SMT-JUMPER_2_NO_SILK]  132.84,46.86 270 top
JP15  JUMPER-SMT_2_NO_SILK  [SMT-JUMPER_2_NO_SILK]  130.3,46.86 270 top
JP16  JUMPER-SMT_3_2-NC_TRACE_SILK  [SMT-JUMPER_3_2-NC_TRACE_SILK]  134.11,41.15 180 top
JP17  JUMPER-SMT_2_NO_SILK  [SMT-JUMPER_2_NO_SILK]  171.45,46.86 270 top
JP18  JUMPER-SMT_2_NO_SILK  [SMT-JUMPER_2_NO_SILK]  168.91,46.86 270 top
JP19  JUMPER-SMT_2_NO_SILK  [SMT-JUMPER_2_NO_SILK]  166.37,46.86 270 top
JP20  JUMPER-SMT_3_2-NC_TRACE_SILK  [SMT-JUMPER_3_2-NC_TRACE_SILK]  170.18,41.15 180 top
JP21  JUMPER-SMT_2_NO_SILK  [SMT-JUMPER_2_NO_SILK]  27.18,101.98 270 top
JP22  JUMPER-SMT_2_NO_SILK  [SMT-JUMPER_2_NO_SILK]  24.64,101.98 270 top
JP23  JUMPER-SMT_2_NO_SILK  [SMT-JUMPER_2_NO_SILK]  22.1,101.98 270 top
JP24  JUMPER-SMT_3_2-NC_TRACE_SILK  [SMT-JUMPER_3_2-NC_TRACE_SILK]  25.91,96.27 180 top
JP25  JUMPER-SMT_2_NO_SILK  [SMT-JUMPER_2_NO_SILK]  63.25,101.98 270 top
JP26  JUMPER-SMT_2_NO_SILK  [SMT-JUMPER_2_NO_SILK]  60.71,101.98 270 top
JP27  JUMPER-SMT_2_NO_SILK  [SMT-JUMPER_2_NO_SILK]  58.17,101.98 270 top
JP28  JUMPER-SMT_3_2-NC_TRACE_SILK  [SMT-JUMPER_3_2-NC_TRACE_SILK]  61.98,96.27 180 top
JP29  JUMPER-SMT_2_NO_SILK  [SMT-JUMPER_2_NO_SILK]  99.31,101.98 270 top
JP30  JUMPER-SMT_2_NO_SILK  [SMT-JUMPER_2_NO_SILK]  96.77,101.98 270 top
JP31  JUMPER-SMT_2_NO_SILK  [SMT-JUMPER_2_NO_SILK]  94.23,101.98 270 top
JP32  JUMPER-SMT_3_2-NC_TRACE_SILK  [SMT-JUMPER_3_2-NC_TRACE_SILK]  98.04,96.27 180 top
JP33  JUMPER-SMT_2_NO_SILK  [SMT-JUMPER_2_NO_SILK]  135.38,101.98 270 top
JP34  JUMPER-SMT_2_NO_SILK  [SMT-JUMPER_2_NO_SILK]  132.84,101.98 270 top
JP35  JUMPER-SMT_2_NO_SILK  [SMT-JUMPER_2_NO_SILK]  130.3,101.98 270 top
JP36  JUMPER-SMT_3_2-NC_TRACE_SILK  [SMT-JUMPER_3_2-NC_TRACE_SILK]  134.11,96.27 180 top
JP37  JUMPER-SMT_2_NO_SILK  [SMT-JUMPER_2_NO_SILK]  171.45,101.98 270 top
JP38  JUMPER-SMT_2_NO_SILK  [SMT-JUMPER_2_NO_SILK]  168.91,101.98 270 top
JP39  JUMPER-SMT_2_NO_SILK  [SMT-JUMPER_2_NO_SILK]  166.37,101.98 270 top
JP40  JUMPER-SMT_3_2-NC_TRACE_SILK  [SMT-JUMPER_3_2-NC_TRACE_SILK]  170.18,96.27 180 top
LOGO1  OSHW-LOGOMINI  [OSHW-LOGO-MINI]  13.46,9.29 0 bottom
LOGO2  REVISION  [REVISION]  9.4,-4.57 0 top  (outside the outline)
LOGO3  OSHW-LOGOMINI  [OSHW-LOGO-MINI]  49.53,9.29 0 bottom
LOGO4  REVISION  [REVISION]  45.47,-4.57 0 top  (outside the outline)
LOGO5  OSHW-LOGOMINI  [OSHW-LOGO-MINI]  85.59,9.29 0 bottom
LOGO6  REVISION  [REVISION]  81.53,-4.57 0 top  (outside the outline)
LOGO7  OSHW-LOGOMINI  [OSHW-LOGO-MINI]  121.66,9.29 0 bottom
LOGO8  REVISION  [REVISION]  117.6,-4.57 0 top  (outside the outline)
LOGO9  OSHW-LOGOMINI  [OSHW-LOGO-MINI]  157.73,9.29 0 bottom
LOGO10  REVISION  [REVISION]  153.67,-4.57 0 top  (outside the outline)
LOGO11  OSHW-LOGOMINI  [OSHW-LOGO-MINI]  13.46,64.41 0 bottom
LOGO12  REVISION  [REVISION]  9.4,50.55 0 top
LOGO13  OSHW-LOGOMINI  [OSHW-LOGO-MINI]  49.53,64.41 0 bottom
LOGO14  REVISION  [REVISION]  45.47,50.55 0 top
LOGO15  OSHW-LOGOMINI  [OSHW-LOGO-MINI]  85.59,64.41 0 bottom
LOGO16  REVISION  [REVISION]  81.53,50.55 0 top
LOGO17  OSHW-LOGOMINI  [OSHW-LOGO-MINI]  121.66,64.41 0 bottom
LOGO18  REVISION  [REVISION]  117.6,50.55 0 top
LOGO19  OSHW-LOGOMINI  [OSHW-LOGO-MINI]  157.73,64.41 0 bottom
LOGO20  REVISION  [REVISION]  153.67,50.55 0 top
R1  4.7k  [0603]  16,38.86 180 top
R2  4.7k  [0603]  33.27,17.02 0 top
R3  4.7k  [0603]  33.27,18.54 0 top
R4  4.7k  [0603]  24.64,38.61 270 top
R5  4.7k  [0603]  27.18,38.61 270 top
R6  4.7k  [0603]  16,49.02 180 top
R7  4.7k  [0603]  16,47.5 180 top
R8  4.7k  [0603]  16,37.34 180 top
R9  4.7k  [0603]  16,28.7 180 top
R10  4.7k  [0603]  16,27.18 180 top
R11  4.7k  [0603]  16,18.54 180 top
R12  4.7k  [0603]  16,17.02 180 top
R13  4.7k  [0603]  33.27,27.18 0 top
R14  4.7k  [0603]  33.27,28.7 0 top
R15  4.7k  [0603]  33.27,37.34 0 top
R16  4.7k  [0603]  33.27,38.86 0 top
R17  4.7k  [0603]  33.27,47.5 0 top
R18  4.7k  [0603]  33.27,49.02 0 top
R19  10k  [0603]  22.1,50.04 270 top
R20  10k  [0603]  24.64,50.04 270 top
R21  10k  [0603]  27.18,50.04 270 top
R22  10k  [0603]  18.42,43.69 270 top
R23  4.7k  [0603]  60.71,38.61 270 top
R24  1k  [0603]  34.8,56.39 0 top
R25  4.7k  [0603]  63.25,38.61 270 top
R26  4.7k  [0603]  52.07,49.02 180 top
R27  4.7k  [0603]  52.07,47.5 180 top
R28  4.7k  [0603]  52.07,38.86 180 top
R29  4.7k  [0603]  52.07,37.34 180 top
R30  4.7k  [0603]  52.07,28.7 180 top
R31  4.7k  [0603]  52.07,27.18 180 top
R32  4.7k  [0603]  52.07,18.54 180 top
R33  4.7k  [0603]  52.07,17.02 180 top
R34  4.7k  [0603]  69.34,17.02 0 top
R35  4.7k  [0603]  69.34,18.54 0 top
R36  4.7k  [0603]  69.34,27.18 0 top
R37  4.7k  [0603]  69.34,28.7 0 top
R38  4.7k  [0603]  69.34,37.34 0 top
R39  4.7k  [0603]  69.34,38.86 0 top
R40  4.7k  [0603]  69.34,47.5 0 top
R41  4.7k  [0603]  69.34,49.02 0 top
R42  10k  [0603]  58.17,50.04 270 top
R43  10k  [0603]  60.71,50.04 270 top
R44  10k  [0603]  63.25,50.04 270 top
R45  10k  [0603]  54.48,43.69 270 top
R46  1k  [0603]  70.87,56.39 0 top
R47  4.7k  [0603]  96.77,38.61 270 top
R48  4.7k  [0603]  99.31,38.61 270 top
R49  4.7k  [0603]  88.14,49.02 180 top
R50  4.7k  [0603]  88.14,47.5 180 top
R51  4.7k  [0603]  88.14,38.86 180 top
R52  4.7k  [0603]  88.14,37.34 180 top
R53  4.7k  [0603]  88.14,28.7 180 top
R54  4.7k  [0603]  88.14,27.18 180 top
R55  4.7k  [0603]  88.14,18.54 180 top
R56  4.7k  [0603]  88.14,17.02 180 top
R57  4.7k  [0603]  105.41,17.02 0 top
R58  4.7k  [0603]  105.41,18.54 0 top
R59  4.7k  [0603]  105.41,27.18 0 top
R60  4.7k  [0603]  105.41,28.7 0 top
R61  4.7k  [0603]  105.41,37.34 0 top
R62  4.7k  [0603]  105.41,38.86 0 top
R63  4.7k  [0603]  105.41,47.5 0 top
R64  4.7k  [0603]  105.41,49.02 0 top
R65  10k  [0603]  94.23,50.04 270 top
R66  10k  [0603]  96.77,50.04 270 top
R67  10k  [0603]  99.31,50.04 270 top
R68  10k  [0603]  90.55,43.69 270 top
R69  1k  [0603]  106.93,56.39 0 top
R70  4.7k  [0603]  132.84,38.61 270 top
R71  4.7k  [0603]  135.38,38.61 270 top
R72  4.7k  [0603]  124.21,49.02 180 top
R73  4.7k  [0603]  124.21,47.5 180 top
R74  4.7k  [0603]  124.21,38.86 180 top
R75  4.7k  [0603]  124.21,37.34 180 top
R76  4.7k  [0603]  124.21,28.7 180 top
R77  4.7k  [0603]  124.21,27.18 180 top
R78  4.7k  [0603]  124.21,18.54 180 top
R79  4.7k  [0603]  124.21,17.02 180 top
R80  4.7k  [0603]  141.48,17.02 0 top
R81  4.7k  [0603]  141.48,18.54 0 top
R82  4.7k  [0603]  141.48,27.18 0 top
R83  4.7k  [0603]  141.48,28.7 0 top
R84  4.7k  [0603]  141.48,37.34 0 top
R85  4.7k  [0603]  141.48,38.86 0 top
R86  4.7k  [0603]  141.48,47.5 0 top
R87  4.7k  [0603]  141.48,49.02 0 top
R88  10k  [0603]  130.3,50.04 270 top
R89  10k  [0603]  132.84,50.04 270 top
R90  10k  [0603]  135.38,50.04 270 top
R91  10k  [0603]  126.62,43.69 270 top
R92  1k  [0603]  143,56.39 0 top
R93  4.7k  [0603]  168.91,38.61 270 top
R94  4.7k  [0603]  171.45,38.61 270 top
R95  4.7k  [0603]  160.27,49.02 180 top
R96  4.7k  [0603]  160.27,47.5 180 top
R97  4.7k  [0603]  160.27,38.86 180 top
R98  4.7k  [0603]  160.27,37.34 180 top
R99  4.7k  [0603]  160.27,28.7 180 top
R100  4.7k  [0603]  160.27,27.18 180 top
R101  4.7k  [0603]  160.27,18.54 180 top
R102  4.7k  [0603]  160.27,17.02 180 top
R103  4.7k  [0603]  177.55,17.02 0 top
R104  4.7k  [0603]  177.55,18.54 0 top
R105  4.7k  [0603]  177.55,27.18 0 top
R106  4.7k  [0603]  177.55,28.7 0 top
R107  4.7k  [0603]  177.55,37.34 0 top
R108  4.7k  [0603]  177.55,38.86 0 top
R109  4.7k  [0603]  177.55,47.5 0 top
R110  4.7k  [0603]  177.55,49.02 0 top
R111  10k  [0603]  166.37,50.04 270 top
R112  10k  [0603]  168.91,50.04 270 top
R113  10k  [0603]  171.45,50.04 270 top
R114  10k  [0603]  162.69,43.69 270 top
R115  1k  [0603]  179.07,56.39 0 top
R116  4.7k  [0603]  24.64,93.73 270 top
R117  4.7k  [0603]  27.18,93.73 270 top
R118  4.7k  [0603]  16,104.14 180 top
R119  4.7k  [0603]  16,102.62 180 top
R120  4.7k  [0603]  16,93.98 180 top
R121  4.7k  [0603]  16,92.46 180 top
R122  4.7k  [0603]  16,83.82 180 top
R123  4.7k  [0603]  16,82.3 180 top
R124  4.7k  [0603]  16,73.66 180 top
R125  4.7k  [0603]  16,72.14 180 top
R126  4.7k  [0603]  33.27,72.14 0 top
R127  4.7k  [0603]  33.27,73.66 0 top
R128  4.7k  [0603]  33.27,82.3 0 top
R129  4.7k  [0603]  33.27,83.82 0 top
R130  4.7k  [0603]  33.27,92.46 0 top
R131  4.7k  [0603]  33.27,93.98 0 top
R132  4.7k  [0603]  33.27,102.62 0 top
R133  4.7k  [0603]  33.27,104.14 0 top
R134  10k  [0603]  22.1,105.16 270 top
R135  10k  [0603]  24.64,105.16 270 top
R136  10k  [0603]  27.18,105.16 270 top
R137  10k  [0603]  18.42,98.81 270 top
R138  1k  [0603]  34.8,111.51 0 top
R139  4.7k  [0603]  60.71,93.73 270 top
R140  4.7k  [0603]  63.25,93.73 270 top
R141  4.7k  [0603]  52.07,104.14 180 top
R142  4.7k  [0603]  52.07,102.62 180 top
R143  4.7k  [0603]  52.07,93.98 180 top
R144  4.7k  [0603]  52.07,92.46 180 top
R145  4.7k  [0603]  52.07,83.82 180 top
R146  4.7k  [0603]  52.07,82.3 180 top
R147  4.7k  [0603]  52.07,73.66 180 top
R148  4.7k  [0603]  52.07,72.14 180 top
R149  4.7k  [0603]  69.34,72.14 0 top
R150  4.7k  [0603]  69.34,73.66 0 top
R151  4.7k  [0603]  69.34,82.3 0 top
R152  4.7k  [0603]  69.34,83.82 0 top
R153  4.7k  [0603]  69.34,92.46 0 top
R154  4.7k  [0603]  69.34,93.98 0 top
R155  4.7k  [0603]  69.34,102.62 0 top
R156  4.7k  [0603]  69.34,104.14 0 top
R157  10k  [0603]  58.17,105.16 270 top
R158  10k  [0603]  60.71,105.16 270 top
R159  10k  [0603]  63.25,105.16 270 top
R160  10k  [0603]  54.48,98.81 270 top
R161  1k  [0603]  70.87,111.51 0 top
R162  4.7k  [0603]  96.77,93.73 270 top
R163  4.7k  [0603]  99.31,93.73 270 top
R164  4.7k  [0603]  88.14,104.14 180 top
R165  4.7k  [0603]  88.14,102.62 180 top
R166  4.7k  [0603]  88.14,93.98 180 top
R167  4.7k  [0603]  88.14,92.46 180 top
R168  4.7k  [0603]  88.14,83.82 180 top
R169  4.7k  [0603]  88.14,82.3 180 top
R170  4.7k  [0603]  88.14,73.66 180 top
R171  4.7k  [0603]  88.14,72.14 180 top
R172  4.7k  [0603]  105.41,72.14 0 top
R173  4.7k  [0603]  105.41,73.66 0 top
R174  4.7k  [0603]  105.41,82.3 0 top
R175  4.7k  [0603]  105.41,83.82 0 top
R176  4.7k  [0603]  105.41,92.46 0 top
R177  4.7k  [0603]  105.41,93.98 0 top
R178  4.7k  [0603]  105.41,102.62 0 top
R179  4.7k  [0603]  105.41,104.14 0 top
R180  10k  [0603]  94.23,105.16 270 top
R181  10k  [0603]  96.77,105.16 270 top
R182  10k  [0603]  99.31,105.16 270 top
R183  10k  [0603]  90.55,98.81 270 top
R184  1k  [0603]  106.93,111.51 0 top
R185  4.7k  [0603]  132.84,93.73 270 top
R186  4.7k  [0603]  135.38,93.73 270 top
R187  4.7k  [0603]  124.21,104.14 180 top
R188  4.7k  [0603]  124.21,102.62 180 top
R189  4.7k  [0603]  124.21,93.98 180 top
R190  4.7k  [0603]  124.21,92.46 180 top
R191  4.7k  [0603]  124.21,83.82 180 top
R192  4.7k  [0603]  124.21,82.3 180 top
R193  4.7k  [0603]  124.21,73.66 180 top
R194  4.7k  [0603]  124.21,72.14 180 top
R195  4.7k  [0603]  141.48,72.14 0 top
R196  4.7k  [0603]  141.48,73.66 0 top
R197  4.7k  [0603]  141.48,82.3 0 top
R198  4.7k  [0603]  141.48,83.82 0 top
R199  4.7k  [0603]  141.48,92.46 0 top
R200  4.7k  [0603]  141.48,93.98 0 top
R201  4.7k  [0603]  141.48,102.62 0 top
R202  4.7k  [0603]  141.48,104.14 0 top
R203  10k  [0603]  130.3,105.16 270 top
R204  10k  [0603]  132.84,105.16 270 top
R205  10k  [0603]  135.38,105.16 270 top
R206  10k  [0603]  126.62,98.81 270 top
R207  1k  [0603]  143,111.51 0 top
R208  4.7k  [0603]  168.91,93.73 270 top
R209  4.7k  [0603]  171.45,93.73 270 top
R210  4.7k  [0603]  160.27,104.14 180 top
R211  4.7k  [0603]  160.27,102.62 180 top
R212  4.7k  [0603]  160.27,93.98 180 top
R213  4.7k  [0603]  160.27,92.46 180 top
R214  4.7k  [0603]  160.27,83.82 180 top
R215  4.7k  [0603]  160.27,82.3 180 top
R216  4.7k  [0603]  160.27,73.66 180 top
R217  4.7k  [0603]  160.27,72.14 180 top
R218  4.7k  [0603]  177.55,72.14 0 top
R219  4.7k  [0603]  177.55,73.66 0 top
R220  4.7k  [0603]  177.55,82.3 0 top
R221  4.7k  [0603]  177.55,83.82 0 top
R222  4.7k  [0603]  177.55,92.46 0 top
R223  4.7k  [0603]  177.55,93.98 0 top
R224  4.7k  [0603]  177.55,102.62 0 top
R225  4.7k  [0603]  177.55,104.14 0 top
R226  10k  [0603]  166.37,105.16 270 top
R227  10k  [0603]  168.91,105.16 270 top
R228  10k  [0603]  171.45,105.16 270 top
R229  10k  [0603]  162.69,98.81 270 top
R230  1k  [0603]  179.07,111.51 0 top
U1  PCA9548A  [TSSOP28]  60.71,32.26 0 top
U2  PCA9548A  [TSSOP28]  24.64,32.26 0 top
U3  PCA9548A  [TSSOP28]  96.77,32.26 0 top
U4  PCA9548A  [TSSOP28]  132.84,32.26 0 top
U5  PCA9548A  [TSSOP28]  168.91,32.26 0 top
U6  PCA9548A  [TSSOP28]  24.64,87.38 0 top
U7  PCA9548A  [TSSOP28]  60.71,87.38 0 top
U8  PCA9548A  [TSSOP28]  96.77,87.38 0 top
U9  PCA9548A  [TSSOP28]  132.84,87.38 0 top
U10  PCA9548A  [TSSOP28]  168.91,87.38 0 top
U$1  SFE_LOGO_NAME_FLAME.1_INCH  [SFE_LOGO_NAME_FLAME_.1]  24.64,24.64 0 top
U$2  SFE_LOGO_NAME_FLAME.1_INCH  [SFE_LOGO_NAME_FLAME_.1]  24.64,24.64 0 bottom
U$3  [I2C_MUX8]  30.48,19.56 0 bottom
U$4  [QWIIC_5.5MM]  24.64,22.1 0 top
U$5  [04]  22.1,43.69 90 top
U$6  [00]  15.75,47.5 0 top
U$7  [11]  15.75,37.34 0 top
U$8  [22]  15.75,27.18 0 top
U$9  [33]  16,17.14 0 top
U$10  [44]  28.45,17.02 0 top
U$11  [55]  28.7,27.3 0 top
U$12  [00]  20.95,47.5 0 bottom
U$13  [77]  28.7,47.5 0 top
U$14  [!RST_I]  13.59,53.85 0 top
U$15  [I2C_MUX8]  18.8,19.56 0 top
U$16  [MAIN0]  20.07,54.1 0 top
U$17  [61]  28.57,37.46 0 top
U$18  [11]  20.83,37.34 0 bottom
U$19  [22]  20.95,27.18 0 bottom
U$20  [33]  20.7,17.14 0 bottom
U$21  [44]  33.27,17.02 0 bottom
U$22  [55]  33.15,27.3 0 bottom
U$23  [61]  33.27,37.46 0 bottom
U$24  [77]  33.15,47.5 0 bottom
U$25  [MAIN0]  29.08,54.1 0 bottom
U$26  [!RST_I]  17.91,53.85 0 bottom
U$27  [MAIN0]  20.14,14.22 0 top
U$28  [MAIN0]  29.13,14.22 0 bottom
U$29  SFE_LOGO_NAME_FLAME.1_INCH  [SFE_LOGO_NAME_FLAME_.1]  60.71,24.64 0 top
U$30  SFE_LOGO_NAME_FLAME.1_INCH  [SFE_LOGO_NAME_FLAME_.1]  60.71,24.64 0 bottom
U$31  [PWR_TO]  32.26,58.93 0 top
U$32  [15]  24.64,43.69 90 top
U$33  [26]  27.18,43.43 90 top
U$34  [ADR3]  29.08,44.32 90 top
U$35  [I#C6]  20.83,41.15 0 top
U$36  [QWIIC_5.5MM]  24.64,22.1 0 bottom
U$37  [00]  51.82,47.5 0 top
U$38  [44]  64.52,17.02 0 top
U$39  [55]  64.77,27.3 0 top
U$40  [77]  64.77,47.5 0 top
U$41  [11]  51.82,37.34 0 top
U$42  [22]  51.82,27.18 0 top
U$43  [33]  52.07,17.14 0 top
U$44  [I2C_MUX8]  54.86,19.56 0 top
U$45  [MAIN0]  56.13,54.1 0 top
U$46  [61]  64.64,37.46 0 top
U$47  [00]  57.02,47.5 0 bottom
U$48  [11]  56.9,37.34 0 bottom
U$49  [22]  57.02,27.18 0 bottom
U$50  [33]  56.77,17.14 0 bottom
U$51  [44]  69.34,17.02 0 bottom
U$52  [55]  69.22,27.3 0 bottom
U$53  [61]  69.34,37.46 0 bottom
U$54  [77]  69.22,47.5 0 bottom
U$55  [MAIN0]  65.15,54.1 0 bottom
U$56  [MAIN0]  56.21,14.22 0 top
U$57  [MAIN0]  65.2,14.22 0 bottom
U$58  [!RST_I]  49.66,53.85 0 top
U$59  [!RST_I]  53.97,53.85 0 bottom
U$60  [PWR_TO]  68.33,58.93 0 top
U$61  [I2C_MUX8]  66.55,19.56 0 bottom
U$62  [QWIIC_5.5MM]  60.71,22.1 0 top
U$63  [QWIIC_5.5MM]  60.71,22.1 0 bottom
U$64  [I#C6]  56.9,41.15 0 top
U$65  [04]  58.17,43.69 90 top
U$66  [15]  60.71,43.69 90 top
U$67  [26]  63.25,43.43 90 top
U$68  [ADR3]  65.15,44.32 90 top
U$69  SFE_LOGO_NAME_FLAME.1_INCH  [SFE_LOGO_NAME_FLAME_.1]  96.77,24.64 0 top
U$70  SFE_LOGO_NAME_FLAME.1_INCH  [SFE_LOGO_NAME_FLAME_.1]  96.77,24.64 0 bottom
U$71  [00]  87.88,47.5 0 top
U$72  [44]  100.58,17.02 0 top
U$73  [55]  100.84,27.3 0 top
U$74  [77]  100.84,47.5 0 top
U$75  [11]  87.88,37.34 0 top
U$76  [22]  87.88,27.18 0 top
U$77  [33]  88.14,17.14 0 top
U$78  [I2C_MUX8]  90.93,19.56 0 top
U$79  [MAIN0]  92.2,54.1 0 top
U$80  [61]  100.71,37.46 0 top
U$81  [00]  93.09,47.5 0 bottom
U$82  [11]  92.96,37.34 0 bottom
U$83  [22]  93.09,27.18 0 bottom
U$84  [33]  92.84,17.14 0 bottom
U$85  [44]  105.41,17.02 0 bottom
U$86  [55]  105.28,27.3 0 bottom
U$87  [61]  105.41,37.46 0 bottom
U$88  [77]  105.28,47.5 0 bottom
U$89  [MAIN0]  101.22,54.1 0 bottom
U$90  [MAIN0]  92.28,14.22 0 top
U$91  [MAIN0]  101.27,14.22 0 bottom
U$92  [!RST_I]  85.73,53.85 0 top
U$93  [!RST_I]  90.04,53.85 0 bottom
U$94  [PWR_TO]  104.39,58.93 0 top
U$95  [I2C_MUX8]  102.62,19.56 0 bottom
U$96  [QWIIC_5.5MM]  96.77,22.1 0 top
U$97  [QWIIC_5.5MM]  96.77,22.1 0 bottom
U$98  [I#C6]  92.96,41.15 0 top
U$99  [04]  94.23,43.69 90 top
U$100  [15]  96.77,43.69 90 top
U$101  [26]  99.31,43.43 90 top
U$102  [ADR3]  101.22,44.32 90 top
U$103  SFE_LOGO_NAME_FLAME.1_INCH  [SFE_LOGO_NAME_FLAME_.1]  132.84,24.64 0 top
U$104  SFE_LOGO_NAME_FLAME.1_INCH  [SFE_LOGO_NAME_FLAME_.1]  132.84,24.64 0 bottom
U$105  [00]  123.95,47.5 0 top
U$106  [44]  136.65,17.02 0 top
U$107  [55]  136.91,27.3 0 top
U$108  [77]  136.91,47.5 0 top
U$109  [11]  123.95,37.34 0 top
U$110  [22]  123.95,27.18 0 top
U$111  [33]  124.21,17.14 0 top
U$112  [I2C_MUX8]  127,19.56 0 top
U$113  [MAIN0]  128.27,54.1 0 top
U$114  [61]  136.78,37.46 0 top
U$115  [00]  129.16,47.5 0 bottom
U$116  [11]  129.03,37.34 0 bottom
U$117  [22]  129.16,27.18 0 bottom
U$118  [33]  128.91,17.14 0 bottom
U$119  [44]  141.48,17.02 0 bottom
U$120  [55]  141.35,27.3 0 bottom
U$121  [61]  141.48,37.46 0 bottom
U$122  [77]  141.35,47.5 0 bottom
U$123  [MAIN0]  137.29,54.1 0 bottom
U$124  [MAIN0]  128.35,14.22 0 top
U$125  [MAIN0]  137.34,14.22 0 bottom
U$126  [!RST_I]  121.79,53.85 0 top
U$127  [!RST_I]  126.11,53.85 0 bottom
U$128  [PWR_TO]  140.46,58.93 0 top
U$129  [I2C_MUX8]  138.68,19.56 0 bottom
U$130  [QWIIC_5.5MM]  132.84,22.1 0 top
U$131  [QWIIC_5.5MM]  132.84,22.1 0 bottom
U$132  [I#C6]  129.03,41.15 0 top
U$133  [04]  130.3,43.69 90 top
U$134  [15]  132.84,43.69 90 top
U$135  [26]  135.38,43.43 90 top
U$136  [ADR3]  137.29,44.32 90 top
U$137  SFE_LOGO_NAME_FLAME.1_INCH  [SFE_LOGO_NAME_FLAME_.1]  168.91,24.64 0 top
U$138  SFE_LOGO_NAME_FLAME.1_INCH  [SFE_LOGO_NAME_FLAME_.1]  168.91,24.64 0 bottom
U$139  [00]  160.02,47.5 0 top
U$140  [44]  172.72,17.02 0 top
U$141  [55]  172.97,27.3 0 top
U$142  [77]  172.97,47.5 0 top
U$143  [11]  160.02,37.34 0 top
U$144  [22]  160.02,27.18 0 top
U$145  [33]  160.27,17.14 0 top
U$146  [I2C_MUX8]  163.07,19.56 0 top
U$147  [MAIN0]  164.34,54.1 0 top
U$148  [61]  172.85,37.46 0 top
U$149  [00]  165.23,47.5 0 bottom
U$150  [11]  165.1,37.34 0 bottom
U$151  [22]  165.23,27.18 0 bottom
U$152  [33]  164.97,17.14 0 bottom
U$153  [44]  177.55,17.02 0 bottom
U$154  [55]  177.42,27.3 0 bottom
U$155  [61]  177.55,37.46 0 bottom
U$156  [77]  177.42,47.5 0 bottom
U$157  [MAIN0]  173.36,54.1 0 bottom
U$158  [MAIN0]  164.41,14.22 0 top
U$159  [MAIN0]  173.41,14.22 0 bottom
U$160  [!RST_I]  157.86,53.85 0 top
U$161  [!RST_I]  162.18,53.85 0 bottom
U$162  [PWR_TO]  176.53,58.93 0 top
U$163  [I2C_MUX8]  174.75,19.56 0 bottom
U$164  [QWIIC_5.5MM]  168.91,22.1 0 top
U$165  [QWIIC_5.5MM]  168.91,22.1 0 bottom
U$166  [I#C6]  165.1,41.15 0 top
U$167  [04]  166.37,43.69 90 top
U$168  [15]  168.91,43.69 90 top
U$169  [26]  171.45,43.43 90 top
U$170  [ADR3]  173.36,44.32 90 top
U$171  SFE_LOGO_NAME_FLAME.1_INCH  [SFE_LOGO_NAME_FLAME_.1]  24.64,79.76 0 top
U$172  SFE_LOGO_NAME_FLAME.1_INCH  [SFE_LOGO_NAME_FLAME_.1]  24.64,79.76 0 bottom
U$173  [00]  15.75,102.62 0 top
U$174  [44]  28.45,72.14 0 top
U$175  [55]  28.7,82.42 0 top
U$176  [77]  28.7,102.62 0 top
U$177  [11]  15.75,92.46 0 top
U$178  [22]  15.75,82.3 0 top
U$179  [33]  16,72.26 0 top
U$180  [I2C_MUX8]  18.8,74.68 0 top
U$181  [MAIN0]  20.07,109.22 0 top
U$182  [61]  28.57,92.58 0 top
U$183  [00]  20.95,102.62 0 bottom
U$184  [11]  20.83,92.46 0 bottom
U$185  [22]  20.95,82.3 0 bottom
U$186  [33]  20.7,72.26 0 bottom
U$187  [44]  33.27,72.14 0 bottom
U$188  [55]  33.15,82.42 0 bottom
U$189  [61]  33.27,92.58 0 bottom
U$190  [77]  33.15,102.62 0 bottom
U$191  [MAIN0]  29.08,109.22 0 bottom
U$192  [MAIN0]  20.14,69.34 0 top
U$193  [MAIN0]  29.13,69.34 0 bottom
U$194  [!RST_I]  13.59,108.97 0 top
U$195  [!RST_I]  17.91,108.97 0 bottom
U$196  [PWR_TO]  32.26,114.05 0 top
U$197  [I2C_MUX8]  30.48,74.68 0 bottom
U$198  [QWIIC_5.5MM]  24.64,77.22 0 top
U$199  [QWIIC_5.5MM]  24.64,77.22 0 bottom
U$200  [I#C6]  20.83,96.27 0 top
U$201  [04]  22.1,98.81 90 top
U$202  [15]  24.64,98.81 90 top
U$203  [26]  27.18,98.55 90 top
U$204  [ADR3]  29.08,99.44 90 top
U$205  SFE_LOGO_NAME_FLAME.1_INCH  [SFE_LOGO_NAME_FLAME_.1]  60.71,79.76 0 top
U$206  SFE_LOGO_NAME_FLAME.1_INCH  [SFE_LOGO_NAME_FLAME_.1]  60.71,79.76 0 bottom
U$207  [00]  51.82,102.62 0 top
U$208  [44]  64.52,72.14 0 top
U$209  [55]  64.77,82.42 0 top
U$210  [77]  64.77,102.62 0 top
U$211  [11]  51.82,92.46 0 top
U$212  [22]  51.82,82.3 0 top
U$213  [33]  52.07,72.26 0 top
U$214  [I2C_MUX8]  54.86,74.68 0 top
U$215  [MAIN0]  56.13,109.22 0 top
U$216  [61]  64.64,92.58 0 top
U$217  [00]  57.02,102.62 0 bottom
U$218  [11]  56.9,92.46 0 bottom
U$219  [22]  57.02,82.3 0 bottom
U$220  [33]  56.77,72.26 0 bottom
U$221  [44]  69.34,72.14 0 bottom
U$222  [55]  69.22,82.42 0 bottom
U$223  [61]  69.34,92.58 0 bottom
U$224  [77]  69.22,102.62 0 bottom
U$225  [MAIN0]  65.15,109.22 0 bottom
U$226  [MAIN0]  56.21,69.34 0 top
U$227  [MAIN0]  65.2,69.34 0 bottom
U$228  [!RST_I]  49.66,108.97 0 top
U$229  [!RST_I]  53.97,108.97 0 bottom
U$230  [PWR_TO]  68.33,114.05 0 top
U$231  [I2C_MUX8]  66.55,74.68 0 bottom
U$232  [QWIIC_5.5MM]  60.71,77.22 0 top
U$233  [QWIIC_5.5MM]  60.71,77.22 0 bottom
U$234  [I#C6]  56.9,96.27 0 top
U$235  [04]  58.17,98.81 90 top
U$236  [15]  60.71,98.81 90 top
U$237  [26]  63.25,98.55 90 top
U$238  [ADR3]  65.15,99.44 90 top
U$239  SFE_LOGO_NAME_FLAME.1_INCH  [SFE_LOGO_NAME_FLAME_.1]  96.77,79.76 0 top
U$240  SFE_LOGO_NAME_FLAME.1_INCH  [SFE_LOGO_NAME_FLAME_.1]  96.77,79.76 0 bottom
U$241  [00]  87.88,102.62 0 top
U$242  [44]  100.58,72.14 0 top
U$243  [55]  100.84,82.42 0 top
U$244  [77]  100.84,102.62 0 top
U$245  [11]  87.88,92.46 0 top
U$246  [22]  87.88,82.3 0 top
U$247  [33]  88.14,72.26 0 top
U$248  [I2C_MUX8]  90.93,74.68 0 top
U$249  [MAIN0]  92.2,109.22 0 top
U$250  [61]  100.71,92.58 0 top
U$251  [00]  93.09,102.62 0 bottom
U$252  [11]  92.96,92.46 0 bottom
U$253  [22]  93.09,82.3 0 bottom
U$254  [33]  92.84,72.26 0 bottom
U$255  [44]  105.41,72.14 0 bottom
U$256  [55]  105.28,82.42 0 bottom
U$257  [61]  105.41,92.58 0 bottom
U$258  [77]  105.28,102.62 0 bottom
U$259  [MAIN0]  101.22,109.22 0 bottom
U$260  [MAIN0]  92.28,69.34 0 top
U$261  [MAIN0]  101.27,69.34 0 bottom
U$262  [!RST_I]  85.73,108.97 0 top
U$263  [!RST_I]  90.04,108.97 0 bottom
U$264  [PWR_TO]  104.39,114.05 0 top
U$265  [I2C_MUX8]  102.62,74.68 0 bottom
U$266  [QWIIC_5.5MM]  96.77,77.22 0 top
U$267  [QWIIC_5.5MM]  96.77,77.22 0 bottom
U$268  [I#C6]  92.96,96.27 0 top
U$269  [04]  94.23,98.81 90 top
U$270  [15]  96.77,98.81 90 top
U$271  [26]  99.31,98.55 90 top
U$272  [ADR3]  101.22,99.44 90 top
U$273  SFE_LOGO_NAME_FLAME.1_INCH  [SFE_LOGO_NAME_FLAME_.1]  132.84,79.76 0 top
U$274  SFE_LOGO_NAME_FLAME.1_INCH  [SFE_LOGO_NAME_FLAME_.1]  132.84,79.76 0 bottom
U$275  [00]  123.95,102.62 0 top
U$276  [44]  136.65,72.14 0 top
U$277  [55]  136.91,82.42 0 top
U$278  [77]  136.91,102.62 0 top
U$279  [11]  123.95,92.46 0 top
U$280  [22]  123.95,82.3 0 top
U$281  [33]  124.21,72.26 0 top
U$282  [I2C_MUX8]  127,74.68 0 top
U$283  [MAIN0]  128.27,109.22 0 top
U$284  [61]  136.78,92.58 0 top
U$285  [00]  129.16,102.62 0 bottom
U$286  [11]  129.03,92.46 0 bottom
U$287  [22]  129.16,82.3 0 bottom
U$288  [33]  128.91,72.26 0 bottom
U$289  [44]  141.48,72.14 0 bottom
U$290  [55]  141.35,82.42 0 bottom
U$291  [61]  141.48,92.58 0 bottom
U$292  [77]  141.35,102.62 0 bottom
U$293  [MAIN0]  137.29,109.22 0 bottom
U$294  [MAIN0]  128.35,69.34 0 top
U$295  [MAIN0]  137.34,69.34 0 bottom
U$296  [!RST_I]  121.79,108.97 0 top
U$297  [!RST_I]  126.11,108.97 0 bottom
U$298  [PWR_TO]  140.46,114.05 0 top
U$299  [I2C_MUX8]  138.68,74.68 0 bottom
U$300  [QWIIC_5.5MM]  132.84,77.22 0 top
U$301  [QWIIC_5.5MM]  132.84,77.22 0 bottom
U$302  [I#C6]  129.03,96.27 0 top
U$303  [04]  130.3,98.81 90 top
U$304  [15]  132.84,98.81 90 top
U$305  [26]  135.38,98.55 90 top
U$306  [ADR3]  137.29,99.44 90 top
U$307  SFE_LOGO_NAME_FLAME.1_INCH  [SFE_LOGO_NAME_FLAME_.1]  168.91,79.76 0 top
U$308  SFE_LOGO_NAME_FLAME.1_INCH  [SFE_LOGO_NAME_FLAME_.1]  168.91,79.76 0 bottom
U$309  [00]  160.02,102.62 0 top
U$310  [44]  172.72,72.14 0 top
U$311  [55]  172.97,82.42 0 top
U$312  [77]  172.97,102.62 0 top
U$313  [11]  160.02,92.46 0 top
U$314  [22]  160.02,82.3 0 top
U$315  [33]  160.27,72.26 0 top
U$316  [I2C_MUX8]  163.07,74.68 0 top
U$317  [MAIN0]  164.34,109.22 0 top
U$318  [61]  172.85,92.58 0 top
U$319  [00]  165.23,102.62 0 bottom
U$320  [11]  165.1,92.46 0 bottom
U$321  [22]  165.23,82.3 0 bottom
U$322  [33]  164.97,72.26 0 bottom
U$323  [44]  177.55,72.14 0 bottom
U$324  [55]  177.42,82.42 0 bottom
U$325  [61]  177.55,92.58 0 bottom
U$326  [77]  177.42,102.62 0 bottom
U$327  [MAIN0]  173.36,109.22 0 bottom
U$328  [MAIN0]  164.41,69.34 0 top
U$329  [MAIN0]  173.41,69.34 0 bottom
U$330  [!RST_I]  157.86,108.97 0 top
U$331  [!RST_I]  162.18,108.97 0 bottom
U$332  [PWR_TO]  176.53,114.05 0 top
U$333  [I2C_MUX8]  174.75,74.68 0 bottom
U$334  [QWIIC_5.5MM]  168.91,77.22 0 top
U$335  [QWIIC_5.5MM]  168.91,77.22 0 bottom
U$336  [I#C6]  165.1,96.27 0 top
U$337  [04]  166.37,98.81 90 top
U$338  [15]  168.91,98.81 90 top
U$339  [26]  171.45,98.55 90 top
U$340  [ADR3]  173.36,99.44 90 top

## Library data of the parts
C1 C10 C19 C28 C37 C46 C55 C64 C73 C82 = SparkFun-Capacitors; PROD_ID: CAP-00810
C2-C9 C11-C18 C20-C27 C29-C36 C38-C45 C47-C54 C56-C63 C65-C72 C74-C81 C83-C90 = SparkFun-Capacitors; PROD_ID: CAP-00868
D1-D10 = SparkFun-LED; PROD_ID: DIO-00819
E$1-E$4 FD1-FD40 LOGO1-LOGO20 U$1 U$2 U$4 U$29 U$30 U$36 U$62 U$63 U$69 U$70 U$96 U$97 U$103 U$104 U$130 U$131 U$137 U$138 U$164 U$165 U$171 U$172 U$198 U$199 U$205 U$206 U$232 U$233 U$239 U$240 U$266 U$267 U$273 U$274 U$300 U$301 U$307 U$308 U$334 U$335 = SparkFun-Aesthetics
E$5 = SparkFun-Retired
H1-H40 = SparkFun-Hardware
J1 J4-J14 J18-J20 J22-J30 J34-J41 J45-J52 J56-J63 J67-J74 J78-J85 J89-J96 J100-J107 = SparkFun-Connectors; PROD_ID: CONN-13694
J2 J3 J16 J17 J32 J33 J43 J44 J54 J55 J65 J66 J76 J77 J87 J88 J98 J99 J109 J110 = SparkX
J15 J21 J31 J42 J53 J64 J75 J86 J97 J108 = SparkFun-Connectors
JP1-JP40 = SparkFun-Jumpers
R1-R18 R23 R25-R41 R47-R64 R70-R87 R93-R110 R116-R133 R139-R156 R162-R179 R185-R202 R208-R225 = SparkFun-Resistors; PROD_ID: RES-07857
R19-R22 R42-R45 R65-R68 R88-R91 R111-R114 R134-R137 R157-R160 R180-R183 R203-R206 R226-R229 = SparkFun-Resistors; PROD_ID: RES-00824
R24 R46 R69 R92 R115 R138 R161 R184 R207 R230 = SparkFun-Resistors; PROD_ID: RES-07856
U1-U10 = SparkFun-IC-Logic; PROD_ID: IC-13948
U$3 U$6-U$13 U$15 U$18-U$22 U$24 U$37-U$44 U$47-U$52 U$54 U$61 U$71-U$78 U$81-U$86 U$88 U$95 U$105-U$112 U$115-U$120 U$122 U$129 U$139-U$146 U$149-U$154 U$156 U$163 U$173-U$180 U$183-U$188 U$190 U$197 U$207-U$214 U$217-U$222 U$224 U$231 U$241-U$248 U$251-U$256 U$258 U$265 U$275-U$282 U$285-U$290 U$292 U$299 U$309-U$316 U$319-U$324 U$326 U$333 = buzzard_labels (10)
U$5 U$32-U$34 U$65-U$68 U$99-U$102 U$133-U$136 U$167-U$170 U$201-U$204 U$235-U$238 U$269-U$272 U$303-U$306 U$337-U$340 = buzzard_labels (13)
U$14 U$26 U$31 U$58-U$60 U$92-U$94 U$126-U$128 U$160-U$162 U$194-U$196 U$228-U$230 U$262-U$264 U$296-U$298 U$330-U$332 = SparkFun-Buzzard
U$16 U$17 U$23 U$25 U$27 U$28 U$45 U$46 U$53 U$55-U$57 U$79 U$80 U$87 U$89-U$91 U$113 U$114 U$121 U$123-U$125 U$147 U$148 U$155 U$157-U$159 U$181 U$182 U$189 U$191-U$193 U$215 U$216 U$223 U$225-U$227 U$249 U$250 U$257 U$259-U$261 U$283 U$284 U$291 U$293-U$295 U$317 U$318 U$325 U$327-U$329 = buzzard_labels (11)
U$35 U$64 U$98 U$132 U$166 U$200 U$234 U$268 U$302 U$336 = buzzard_labels (14)